# Altium PCB PCB1.PcbDoc
Units mm, origin at the board's own origin, x right, y up, seen from the top; angles counter-clockwise.
Board outline 100 x 35 mm, 2 copper layers (Top Layer, Bottom Layer); 20 components, 5 nets, 106 pads, 97 vias.
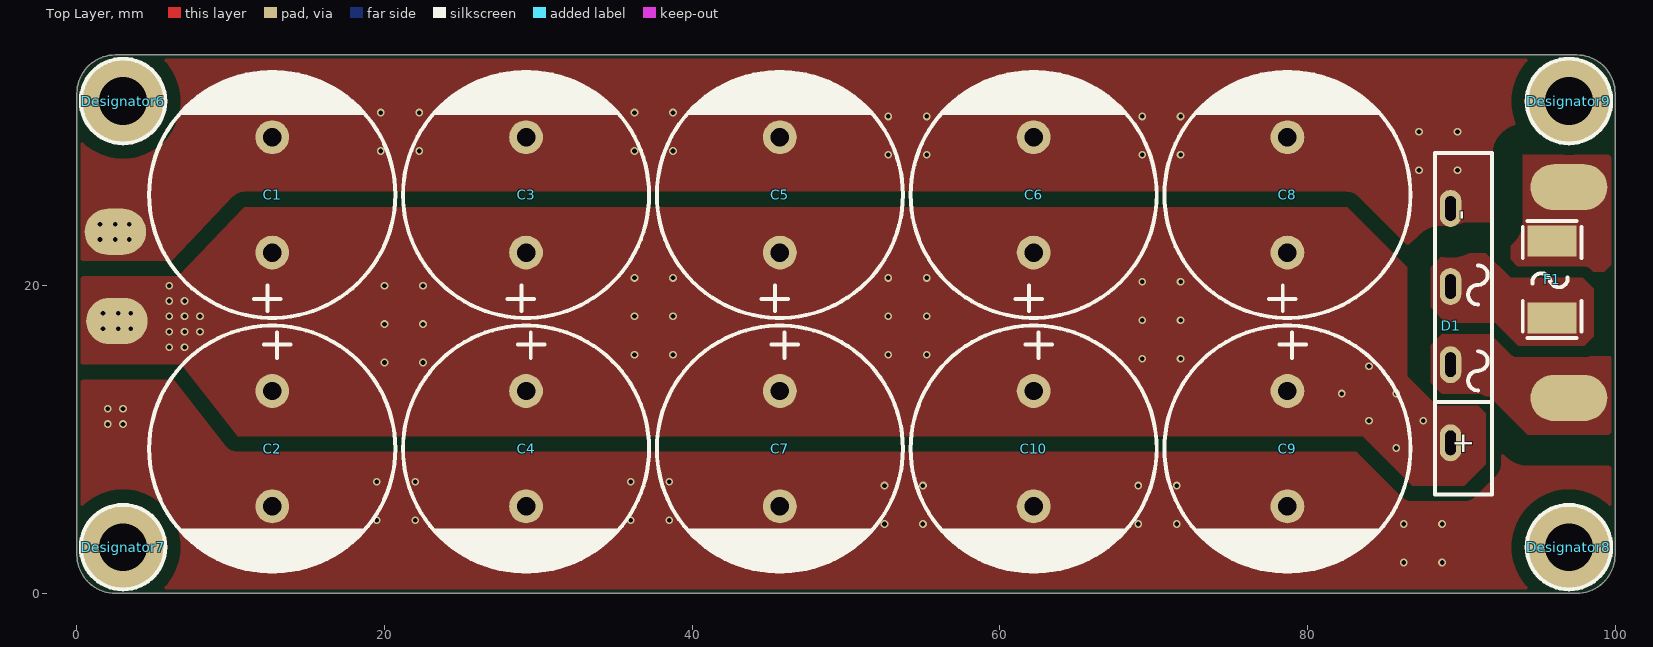
[diagram p0: Top Layer view]
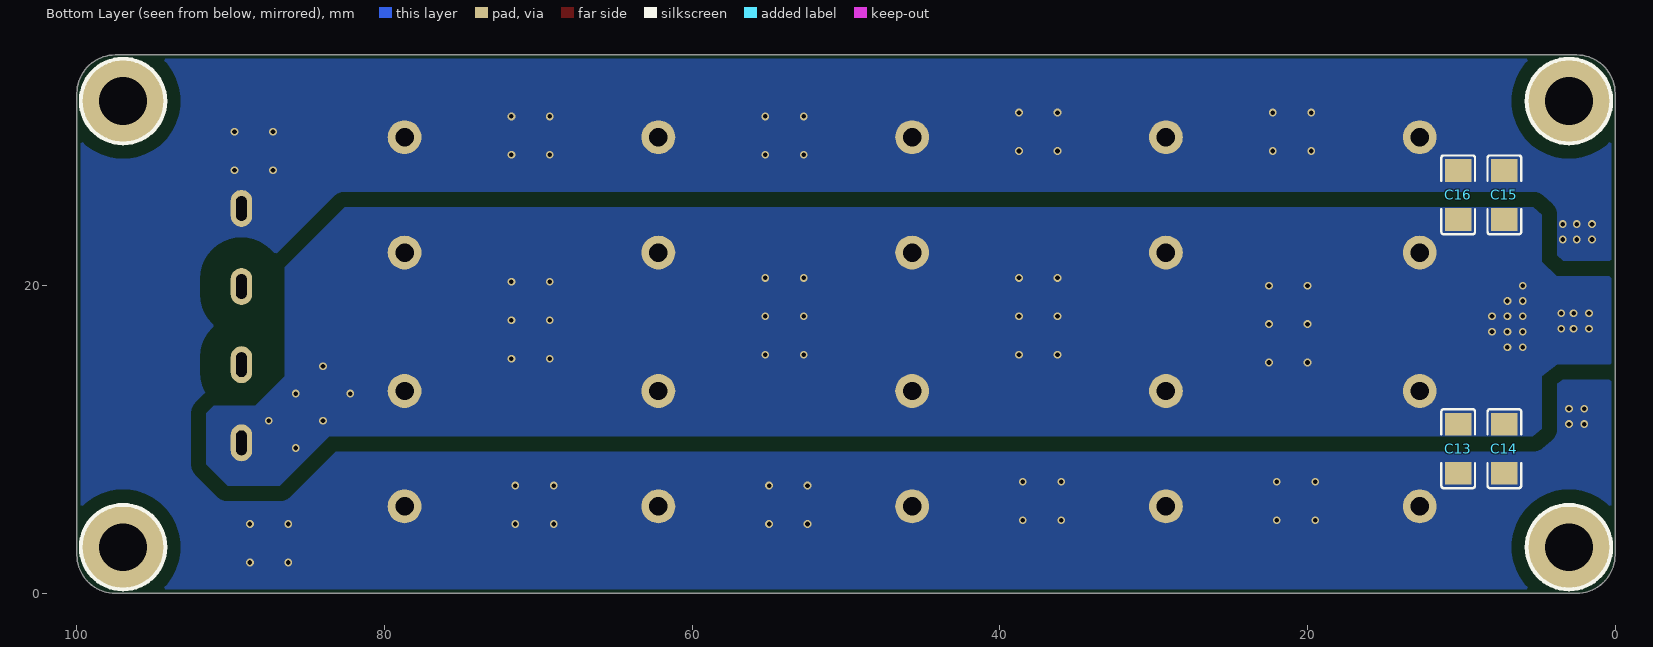
[diagram p1: Bottom Layer view, seen from below]

## Layer stack, top to bottom
Top Solder: solder mask 0.0102, Solder Resist, Dk 3.5
Top Layer: signal copper 0.0356
Dielectric 1: dielectric 0.32, FR-4, Dk 4.8
Bottom Layer: signal copper 0.0356
Bottom Solder: solder mask 0.0102, Solder Resist, Dk 3.5

## Board outline
0,2.5 ccw(c2.5,2.5) 2.5,0 97.5,0 ccw(c97.5,2.5) 100,2.5 100,32.5 ccw(c97.5,32.5) 97.5,35 2.5,35 ccw(c2.5,32.5) 0,32.5

## Design rules (kind name [scope] priority, off if disabled: settings)
BoardOutlineClearance [All] p1: gap=0.254 ignorepadtopadclearanceinfootprint=FALSE
Clearance Clearance_1 [InNet('GND') vs (InNet('AC1') or InNet('AC2') OR InNet('NetD1_3'))] p1: gap=2 ignorepadtopadclearanceinfootprint=FALSE
Clearance [InNet('GND')] p2: gap=1 ignorepadtopadclearanceinfootprint=FALSE
Clearance Clearance_4 [All] p3: gap=0.762 ignorepadtopadclearanceinfootprint=FALSE
PolygonConnect [All] p1: connectstyle=Direct reliefconductorwidth=0.508 reliefentries=4 polygonreliefangle="90 Angle" airgapwidth=0.381
RoutingVias [All] p1: holewidth=0.711 width=1.27 viastyle="Through Hole" minholewidth=0.711 minwidth=1.27 maxholewidth=0.711 maxwidth=1.27
SolderMaskExpansion [All] p1: expansion=0.102 istentingtop=FALSE
Width [All] p1: maxlimit=0.254 minlimit=0.254 preferedwidth=0.254
30 further rules are at their usual default settings.

## Classes and differential pairs
component class Sheet1: C1 C2 C3 C4 C5 C6 C7 C8 C9 C10 C13 C14 C15 C16 D1 F1

## Components (designator, comment, footprint, x,y, rotation, side; value= is the part's Value field where it differs from the comment)
C1 "" CAP-TH_BD16.0-P7.50-D1.2-FD 12.7,25.9 r90 top value=470uF
C2 "" CAP-TH_BD16.0-P7.50-D1.2-FD 12.7,9.4 r270 top value=470uF
C3 "" CAP-TH_BD16.0-P7.50-D1.2-FD 29.2,25.9 r90 top value=470uF
C4 "" CAP-TH_BD16.0-P7.50-D1.2-FD 29.2,9.4 r270 top value=470uF
C5 "" CAP-TH_BD16.0-P7.50-D1.2-FD 45.7,25.9 r90 top value=470uF
C6 "" CAP-TH_BD16.0-P7.50-D1.2-FD 62.2,25.9 r90 top value=470uF
C7 "" CAP-TH_BD16.0-P7.50-D1.2-FD 45.7,9.4 r270 top value=470uF
C8 "" CAP-TH_BD16.0-P7.50-D1.2-FD 78.7,25.9 r90 top value=470uF
C9 "" CAP-TH_BD16.0-P7.50-D1.2-FD 78.7,9.4 r270 top value=470uF
C10 "" CAP-TH_BD16.0-P7.50-D1.2-FD 62.2,9.4 r270 top value=470uF
C13 "" C1206 10.2,9.4 r270 bottom value=100nF
C14 "" C1206 7.2,9.4 r270 bottom value=100nF
C15 "" C1206 7.2,25.9 r90 bottom value=100nF
C16 "" C1206 10.2,25.9 r90 bottom value=100nF
D1 "" GBU_4P-L22.0-W3.6-P5.08 89.3,17.4 r90 top
Designator6 "Comment" Hole_M3 3,32 r0 top
Designator7 "Comment" Hole_M3 3,3 r0 top
Designator8 "Comment" Hole_M3 97,3 r0 top
Designator9 "Comment" Hole_M3 97,32 r0 top
F1 "" F2410 95.9,20.4 r270 top

## Footprints (in the part's own frame and the unit in brackets; to place one, negate y for a bottom-side part, rotate by r counter-clockwise, add the part's x,y. Pads: shape width x height; smd on the part's side, far side on the other; paste and mask are expansions set on the pad)
C1206 [mm]
  rect 1.485x1.728 smd mask+0.051: 1(-1.593,0) 2(1.593,0)
  silkscreen extent -2.56,-1.09 2.56,1.09
CAP-TH_BD16.0-P7.50-D1.2-FD [mm]
  round 2.2 hole 1.2 mask+0.051: 1(-3.75,0) 2(3.75,0)
  silkscreen extent -8,-8 8,8
F2410 [mil]
  rect 78.7x126 smd mask+2: 1(-98.4,0) 2(98.4,0)
  silkscreen extent -150,-75 150,75
GBU_4P-L22.0-W3.6-P5.08 [mil]
  oval 94.5x55.1 hole 27.6 slot 63 at 0 deg mask+2: 1(-300,0) 2(-100,0) 3(100,0) 4(300,0)
  silkscreen extent -433,-106 441,39
Hole_M3 [mm]
  round 0.6 smd: 1(-2.15,0) 1(-1.52,-1.52) 1(-1.52,1.52) 1(0,2.15) 1(0,-2.15) 1(1.52,-1.52) 1(1.52,1.52) 1(2.15,0)
  round 0.6 smd far side: 1(-2.15,0) 1(-1.52,-1.52) 1(-1.52,1.52) 1(0,2.15) 1(0,-2.15) 1(1.52,-1.52) 1(1.52,1.52) 1(2.15,0)
  round 5.5 hole 3.1 mask+0.102: 1(0,0)
  silkscreen extent -2.75,-2.75 2.75,2.75

## Part data
C1 C2 C3 C4 C5 C6 C7 C8 C9 C10: library part KF471M100J250A, JLCPCB Part Class="Extended Part", LCSC Part Name="470uF ±20% 100V", Lifetime @ Temp=5000hrs@105, Manufacturer=CapXon(台湾丰宾), Operating Temperature=-, Rated Voltage=100V, Tolerance=±20%, Add into BOM=yes, Convert to PCB=yes, Datasheet=https://atta.szlcsc.com/upload/public/pdf/source/20190129/C369597_7164598A1FE2AE81858E4062A572FE81.pdf, Device=KF471M100J250A, L=25mm, Lead Spacing=7.5mm, Manufacturer Part=KF471M100J250A, Supplier=LCSC, Supplier Footprint=径向引线,16x25mm, Supplier Part=C369597, Symbol=KF471M100J250A, φD=16mm
C13 C14 C15 C16: library part CC1206KKX7RABB104, JLCPCB Part Class="Extended Part", LCSC Part Name="100nF ±10% 200V", Manufacturer=YAGEO(国巨), Temperature Coefficient=X7R, Tolerance=±10%, Voltage Rated=200V, Add into BOM=yes, Convert to PCB=yes, Datasheet=https://atta.szlcsc.com/upload/public/pdf/source/20170602/1496384493333.pdf, Device=CC1206KKX7RABB104, Manufacturer Part=CC1206KKX7RABB104, Supplier=LCSC, Supplier Footprint=1206, Supplier Part=C113894, Symbol=CC1206KKX7RABB104
D1: library part GBU801, Average Rectified Current (Io)=8A, Forward Voltage (Vf@If)=1V@4A, JLCPCB Part Class="Extended Part", LCSC Part Name="100V 8A", Manufacturer=晶导微电子, Operating Temperature=-55~+150@(Tj), Peak Forward Surge Current=200A, Reverse Leakage Current (Ir)=5A@100V, Reverse Voltage (Vr)=100V, Add into BOM=yes, Convert to PCB=yes, Datasheet=https://atta.szlcsc.com/upload/public/pdf/source/20191021/C438425_805E5DEDEC0DA9CA2A5D2B9251B6BCA3.pdf, Device=GBU801, Manufacturer Part=GBU801, Supplier=LCSC, Supplier Footprint=GBU, Supplier Part=C438425, Symbol=GBU801
F1: library part JFC2410-1800FS, Breaking Capacity @ Rated Voltage=50A, Current Rating=8A, JLCPCB Part Class="Extended Part", LCSC Part Name="8A 250V 快断", Manufacturer=JDTfuse集电通, Nominal Cold Resistance=7mΩ, Nominal Voltage Drop=-, Operating Temperature="-55°C ~ 125°C", Rated Voltage(AC)=250V, Add into BOM=yes, Convert to PCB=yes, Datasheet=https://atta.szlcsc.com/upload/public/pdf/source/20171023/C136373_15087481036331053507.pdf, Device=JFC2410-1800FS, Fuse Type=快速熔断, Manufacturer Part=JFC2410-1800FS, Melting I²t=235.18, Product=贴片式保险丝, Rated Voltage(DC)=-, Supplier=LCSC, Supplier Footprint=SMD, Supplier Part=C136373, Symbol=JFC2410-1800FS

## Free pads (board coordinates)
  oval 4x3 smd: 2(2.5,23.5) 2(2.6,17.7)
  oval 5x3 smd: 2(97,12.7) 2(97,26.4)

## Via types
v1: diameter 0.5, hole 0.3, Top Layer to Bottom Layer, tented both sides, 97 vias

## Nets (pads, with @x,y where several pads share a name; then routed paths per layer and width w, separated by ;. In a path a pad name is that pad's centre, name@x,y a point inside that pad or via, vN(x,y) a via of type N, cw(c..) or ccw(c..) an arc to the next point about the centre after c; other vN are vias at no path point)
AC1: D1.2 pad.2@97,12.7
AC2: F1.1 pad.2@97,26.4
GND: C1.2 C2.2 C3.2 C4.2 C5.2 C6.2 C7.2 C8.2 C9.2 C10.2 C13.2 C14.2 C15.2 C16.2 D1.4 pad.2@2.5,23.5
  other v1: 86.25,2 88.75,2 52.5,4.5 55,4.5 69,4.5 71.5,4.5 86.25,4.5 88.75,4.5 19.5,4.75 22,4.75 36,4.75 38.5,4.75 52.5,7 55,7 69,7 71.5,7 19.5,7.25 22,7.25 36,7.25 38.5,7.25 2,11 3,11 2,12 3,12 1.5,23 2.5,23 3.4,23 1.5,24 2.5,24 3.4,24 87.25,27.5 89.75,27.5 52.75,28.5 55.25,28.5 69.25,28.5 71.75,28.5 19.75,28.75 22.25,28.75 36.25,28.75 38.75,28.75 87.25,30 89.75,30 52.75,31 55.25,31 69.25,31 71.75,31 19.75,31.25 22.25,31.25 36.25,31.25 38.75,31.25
NetD1_3: D1.3 F1.2
VCC: C1.1 C2.1 C3.1 C4.1 C5.1 C6.1 C7.1 C8.1 C9.1 C10.1 C13.1 C14.1 C15.1 C16.1 D1.1 pad.2@2.6,17.7
  other v1: 85.768,9.447 84,11.214 87.536,11.214 82.232,12.982 85.768,12.982 84,14.75 20,15 22.5,15 69.25,15.25 71.75,15.25 36.25,15.5 38.75,15.5 52.75,15.5 55.25,15.5 6,16 7,16 6,17 7,17 8,17 1.7,17.2 2.7,17.2 3.5,17.2 20,17.5 22.5,17.5 69.25,17.75 71.75,17.75 6,18 7,18 8,18 36.25,18 38.75,18 52.75,18 55.25,18 1.7,18.2 2.7,18.2 3.5,18.2 6,19 7,19 6,20 20,20 22.5,20 69.25,20.25 71.75,20.25 36.25,20.5 38.75,20.5 52.75,20.5 55.25,20.5
pads on no net: Designator6.1 Designator7.1 Designator8.1 Designator9.1

## Polygon pours and split planes (outlines as drawn)
GND on Top Layer "GND_L01_P010" (solid, remove dead copper, pour order 10): 0,2.5 ccw(c2.5,2.5) 2.5,0 97.5,0 ccw(c97.5,2.5) 100,2.5 100,32.5 ccw(c97.5,32.5) 97.5,35 2.5,35 ccw(c2.5,32.5) 0,32.5
VCC on Top Layer "VCC_L01_P000" (solid, pour order 0): 91.6,8.4 90.2,7 86.8,7 83.6,10.2 10.455,10.2 6.785,14.9 0.301,14.9 0,15.198 0,20.3 0.3,20.6 6.6,20.6 10.873,25.1 82.6,25.1 86.5,21.2 86.5,14.1 88.4,12.2 91.1,12.2 91.6,11.7
AC1 on Top Layer "AC1_L01_P009" (solid, pour order 9): 88.72,12.8 88,13.52 88,16.12 88.78,16.9 91.9,16.9 93.38,15.42 99.68,15.42 100,15.1 100,10.7 99.6,10.3 94.32,10.3 91.82,12.8
AC2 on Top Layer "AC2_L01_P004" (solid, pour order 4): 94,20.9 93.2,21.7 93.2,28 93.7,28.5 99.6,28.5 100,28.1 100,21.6 99.3,20.9
GND on Top Layer "GND_L01_P003" (solid, pour order 3): 86.4,23 83.4,26 10.2,26 6,21.8 1.3,21.8 0.7,22.4 0.7,27.3 1.3,27.9 4.4,27.9 9.9,33.4 88.4,33.4 92,29.8 92,24 91,23
NetD1_3 on Top Layer "NETD1_3_L01_P001" (solid, pour order 1): 89,17.6 88,18.6 88,21.2 88.9,22.1 91.6,22.1 93.2,20.5 97.9,20.5 98.6,19.8 98.6,16.7 98,16.1 93.7,16.1 92.2,17.6
VCC on Bottom Layer "VCC_L02_P005" (solid, pour order 5): 91.6,8.4 90.2,7 86.8,7 83.6,10.2 5.342,10.2 4.756,10.684 4.756,14.117 3.77,14.9 0.301,14.9 0,15.198 0,20.3 0.3,20.6 3.8,20.6 4.756,21.556 4.756,24.601 5.311,25.1 82.6,25.1 86.5,21.2 86.5,14.1 88.4,12.2 91.1,12.2 91.6,11.7
GND on Bottom Layer "GND_L02_P008" (solid, remove dead copper, pour order 8): 0,2.5 ccw(c2.5,2.5) 2.5,0 97.5,0 ccw(c97.5,2.5) 100,2.5 100,32.5 ccw(c97.5,32.5) 97.5,35 2.5,35 ccw(c2.5,32.5) 0,32.5

## Silkscreen, mask and mechanical layers (free items; w line width, h text height)
Mechanical 6:
  the board outline again, w0.254

## Text inside footprints (layer, text, board x,y; h text height)
D1: Top Overlay "+" at 90.714,8.96 h1.33 r90; Top Overlay "-" at 90.553,24.261 h1.33 r90